# Altium PCB RTTester.PcbDoc (part 2 of 2)
Units mil, origin at the board's own origin, x right, y up, seen from the top; angles counter-clockwise.
Board outline 3930 x 3920 mil, 2 copper layers (Top Layer, Bottom Layer); 146 components, 202 nets, 779 pads, 204 vias.
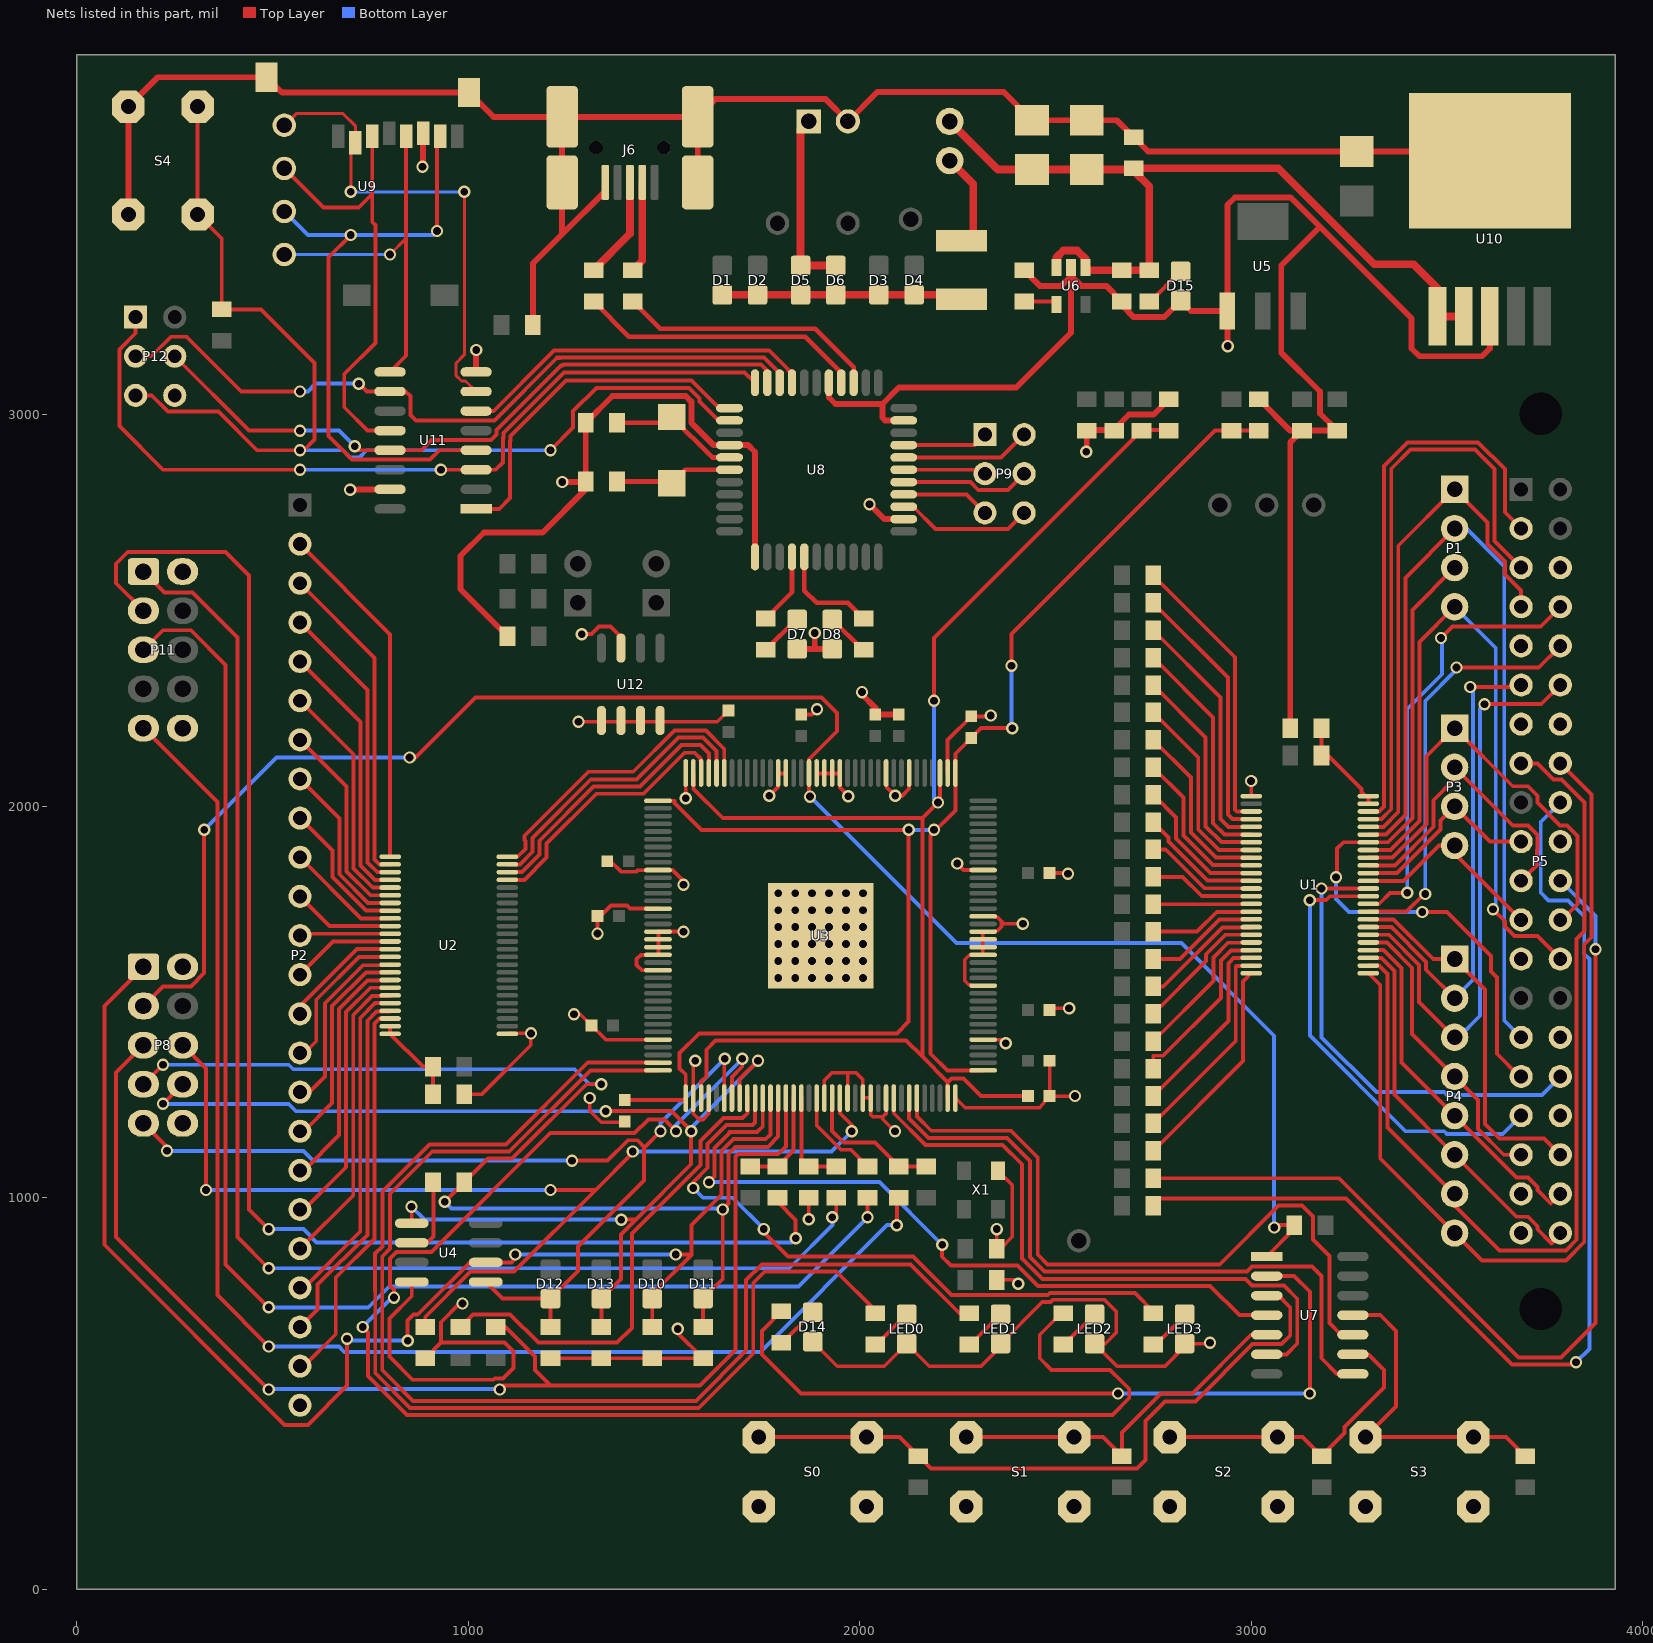
[diagram p2: the nets of this part, all layers, seen from the top]

## Via types
v1: diameter 31.5, hole 19.68, Top Layer to Bottom Layer, tented both sides, 163 vias
v2: diameter 31.5, hole 19.68, Top Layer to Bottom Layer, 36 vias
v3: diameter 39.37, hole 27.56, Top Layer to Bottom Layer, tented both sides, 4 vias
v4: diameter 35.43, hole 27.56, Top Layer to Bottom Layer, tented both sides, 1 vias

## Nets (pads, with @x,y where several pads share a name; then routed paths per layer and width w, separated by ;. In a path a pad name is that pad's centre, name@x,y a point inside that pad or via, vN(x,y) a via of type N, cw(c..) or ccw(c..) an arc to the next point about the centre after c; other vN are vias at no path point) (continued)
FPGAIO_B18: U2.21 U3.106 | length 697.1
  Top Layer w10: U2.21@1099.61,1812.32 1143.21,1812.32 1200,1869.11 1200,1904.7 1327.69,2032.39 1447.7,2032.39 1552.31,2137 1578.4,2137 1593.1,2122.3 1593.1,2118.1 1594.88,2119.88 U3.106@1594.88,2084.37
FPGAIO_B19: U2.22 U3.105 | length 730.5
  Top Layer w10: U2.22@1099.61,1832.01 1137.44,1832.01 1182,1876.57 1182,1912.16 1320.23,2050.39 1438.39,2050.39 1545,2157 1593.09,2157 1614.57,2135.52 U3.105@1614.57,2084.37
FPGAIO_B20: U2.23 U3.104 | length 761.1
  Top Layer w10: U2.23@1099.61,1851.69 1131.67,1851.69 1164,1884.02 1164,1919.62 1312.78,2068.39 1429.39,2068.39 1537,2176 1599.54,2176 1634.25,2141.29 U3.104@1634.25,2084.37
FPGAIO_B21: U2.24 U3.103 | length 792.7
  Top Layer w10: U2.24@1099.61,1871.38 1125.9,1871.38 1146,1891.48 1146,1912.16 1143.93,1914.23 1143.93,1925 1307.39,2088.46 1421.46,2088.46 1527,2194 1607,2194 1653.94,2147.06 U3.103@1653.94,2084.37
GND: C1.2 C2.2 C3.2 C4.2 C5.2 C6.2 C8.2 C10.2 C12.2 C14.2 C17.1 C22.2 C23.2 C24.2 C25.2 C26.2 C27.2 C28.2 C31.2 C33.2 C34.2 C35.2 C42.1 C47.1 C48.2 C49.2 C52.2 C53.2 C54.2 C55.2 C56.1 C57.1 C58.1 C59.2 C60.2 C61.2 C62.2 D7.K D8.K D14.K D15.K J6.5 J6.MH1 J6.MH2 J6.MH3 J6.MH4 LED0.K LED1.K LED2.K LED3.K P2.24 P5.6 P5.9 P5.14 P5.20 P5.25 P5.30 P5.34 P5.39 P6.2 P8.2 P8.10 P11.2 P11.10 P12.6 R34.2 R61.2 S0.1 S1.1 S2.1 S3.1 S4.1 U1.1 U2.1 U3.2 U3.4 U3.19 U3.22 U3.24 U3.25 U3.27 U3.36 U3.41 U3.48 U3.52 U3.53 U3.54 U3.55 U3.57 U3.63 U3.74 U3.79 U3.82 U3.88 U3.89 U3.90 U3.91 U3.95 U3.96 U3.108 U3.118 U3.123 U3.126 U3.127 U3.128 U3.129 U3.131 U3.140 U3.145 U4.4 U5.1 U6.2 U8.5 U8.15 U8.23 U8.35 U8.43 U9.6 U9.GND1 U9.GND3 U10.3 U10.6 U11.8 U11.15 U12.1 U12.2 U12.3 U12.4 U12.7 X1.2 | length 19761.7
  Top Layer w9: C2.2@990,1265 1035,1265 1160,1390 v1(1160,1420) 1100.98,1420 U2.1@1099.61,1418.62 ; v1(1270,1468.61) 1286.39,1468.61 C25.2@1315,1440 1350.75,1404.25 U3.140@1485.63,1404.25 ; v1(1281.51,2216.51) 1342,2216.51 1636.51,2216.51 C22.2@1665,2245 ; v1(1310,1255) 1310,1222.05 1339.3,1192.75 1400,1192.75 C49.2@1400,1195 ; C23.2@1355,1860 1363.74,1860 1390.24,1833.5 1429.76,1833.5 1433.59,1837.32 U3.118@1484.65,1837.32 ; v1(1555.51,2020.51) U3.108@1555.51,2084.37 ; v1(1579.5,1350) 1575.2,1345.69 1575.2,1214.8 1590,1200 1600,1200 1614.57,1214.57 U3.4@1614.57,1255.63 ; v1(1870,945) R34.2@1870,1000 ; D14.K@1880,632.5 1942.5,570 2062.5,570 LED0.K@2120,627.5 2177.5,570 2310,570 2360,620 LED1.K@2360,627.5 2466.25,733.75 2487.49,733.75 2492.74,739 2626.1,739 2655,710.1 2655,655 2627.5,627.5 LED2.K@2600,627.5 2657.5,570 2780,570 2830,620 LED3.K@2830,627.5 2892.5,627.5 v1(2895,630) ; U3.19@1909.84,1255.63 1910,1255.79 1910,1300 1930,1320 1970,1320 ; U3.22@1968.9,1255.63 1968.9,1318.9 1970,1320 ; U3.27@2067.32,1255.63 2067.32,1215.32 2059,1207 ; v1(2090,1170) 2059,1201 2059,1207 ; U3.36@2244.49,1255.63 2270.12,1230 2460,1230 C17.1@2485,1260 ; U3.41@2314.37,1404.25 2363.75,1404.25 v1(2373,1395) ; U3.48@2314.37,1542.05 2284.54,1542.05 2282.26,1544.33 2278.62,1544.33 2268.42,1554.52 2268.42,1608.31 2280.9,1620.79 2314.37,1620.79 2314.37,1679.84 2344.84,1679.84 2347.12,1682.12 2352.09,1682.12 2362.29,1692.32 2362.29,1706.74 ; U3.57@2314.37,1719.21 2344.21,1719.21 2346.49,1716.93 2352.09,1716.93 2362.29,1706.74 ; C3.2@2350,790 2395,790 v1(2405,780) ; v1(2350,920) C4.2@2350,870 2360,870 2390,900 2390,1032.52 X1.2@2353.31,1069.21 ; v1@2410.46,1706.54 v1(2417,1700) 2369.02,1700 2362.29,1706.74 ; C27.2@2485,1350 C17.1@2485,1260 ; C28.2@2485,1480 2489,1484 v1(2535,1484) ; v1(2550,1260) C17.1@2485,1260 ; v1(3000,2065) 3000.39,2064.61 U1.1@3000.39,2026.38 ; 1970,1320 1990,1320 2008.27,1301.73 2008.27,1255.63 2027.95,1255.63 2027.95,1212.05 2033,1207 2059,1207
  Top Layer w10: U4.4@855.51,785 855.51,748.39 798.25,691.13 798.25,594.32 857.57,535 1064.34,535 1068.09,538.75 1088.75,538.75 1115,565 1115,606.97 1091.97,630 930,630 ; R61.2@890,590 930,630 ; v1(985,730) 978.03,730 930,681.97 930,630 ; C54.2@1210,590 C55.2@1340,590 C52.2@1470,590 C53.2@1600,590 1535,655 v1(1535,665) ; v1(1290,2440) 1314.34,2440 1334.34,2460 1363,2460 1393,2430 U12.7@1393,2406.49 ; v1(1330,1675) C24.2@1330,1720 1338.03,1720 1365.03,1747 1404.97,1747 1413.07,1738.9 U3.123@1485.63,1738.9 ; U12.1@1342,2216.51 U12.1@1343,2217.51 ; U3.131@1485.63,1581.42 1443.58,1581.42 1430,1595 1430,1610 1440.79,1620.79 1485.63,1620.79 1485.63,1679.84 1549.84,1679.84 v1(1550,1680) ; 1521.68,1837.32 1550,1809 v1(1550,1800) ; v1(1769,2027) 1791.73,2049.73 1791.73,2084.37 U3.95@1811.42,2084.37 ; C35.2@1850.79,2235 1878,2235 v1(1891,2248) ; U3.91@1890.16,2084.37 1949.21,2084.37 1949.21,2047.79 v1(1971,2026) ; U3.82@2067.32,2084.37 2067.32,2053.68 2069.1,2051.9 2069.1,2048.41 2079.59,2037.92 2083.08,2037.92 v1@2091,2030 ; v1(2091,2027) 2108.38,2027 2126.38,2045 U3.79@2126.38,2084.37 ; U3.74@2224.8,2084.37 2224.8,2169.8 C48.2@2285,2230 2333,2230 v1(2335,2232) ; v1(2249,1854) 2265.68,1837.32 U3.63@2314.37,1837.32 ; C33.2@2485,1830 2530,1830 v1(2532,1828) ; 2540,3355 U6.2@2540,3377.24 ; C59.2@2670,3280 C59.2@2670,3290 ; U10.6@3586.61,3672.99 U10.6@3610,3649.61
  Top Layer w15: S4.1@131.42,3512.21 S4.1@131.42,3787.8 206.62,3863 U9.GND1@484.57,3863 523.57,3824 U9.GND3@1002.28,3824 1064.76,3761.52 J6.MH1@1239.65,3761.52 ; v1(698,2809) 699,2810 U11.15@800,2810 ; v1(883,3634) 884.57,3635.57 U9.6@884.57,3720 ; U11.8@1020,3110 v1(1020,3166) ; C5.2@1100,2435 980,2555 980,2640 1040,2700 1190,2700 1299,2809 C58.1@1299,2829 ; C14.2@1165,3230 1165,3387 1239.65,3461.65 ; v1(1240,2829) C58.1@1299,2829 ; J6.5@1349.89,3594.2 1349.89,3571.89 1239.65,3461.65 ; J6.MH3@1586.11,3594.2 J6.MH4@1586.11,3761.52 ; U8.23@1732.52,2637.56 1732.52,2905.48 1715.01,2922.99 U8.15@1667.56,2922.99 1627.01,2922.99 1569.93,2980.07 1569.93,3034.12 1555.55,3048.5 1368.5,3048.5 C57.1@1300,2980 C58.1@1300,2830 C58.1@1299,2829 ; D7.K@1840,2402.5 1886,2402.5 ; v1(1885,2443) 1885,2403.5 1886,2402.5 ; U8.5@1921.5,3082.44 1921.5,3044.66 1938.16,3028 2058,3028 ; D8.K@1930,2402.5 1886,2402.5 ; v1(2006,2292) 2006,2286 2040,2252 C26.2@2040,2235 C34.2@2100,2235 ; v1(2025,2772) 2062.98,2734.02 U8.35@2112.44,2734.02 ; U8.43@2112.44,2985.98 2065.02,2985.98 2058,2993 2058,3028 ; C60.2@2420,3370 2460,3330 2515,3330 2540,3355 ; C56.1@2570,2962 C61.2@2650,2962 ; v1(2579,2906) 2580,2907 C56.1@2580,2960 ; C61.2@2650,2960 C61.2@2650,2962 ; C59.2@2670,3280 2700,3250 2777.5,3250 D15.K@2820,3292.5 2846.67,3265.83 U5.1@2939.45,3265.83 ; C59.2@2670,3290 2630,3330 2566.2,3330 2540,3356.2 2540,3210 2400,3070 2100,3070 2058,3028 ; C42.1@2790,3040 2751,3001 2688,3001 2650,2963 C61.2@2650,2962 ; v1(2940,3176) 2939.45,3176.55 U5.1@2939.45,3265.83 ; C47.1@3020,3040 3100,2960 C31.2@3130,2960 ; C1.2@3100,2200 3100,2930 C31.2@3130,2960 ; U10.6@3586.61,3672.99 C62.2@3270,3672.99 2737.01,3672.99 C10.2@2700,3710 2657.01,3752.99 C8.2@2580,3752.99 C6.2@2440,3752.99 2367.99,3825 2045,3825 P6.2@1970,3750 1913,3807 1631.59,3807 J6.MH4@1586.11,3761.52 ; U10.3@3610,3251.97 3610,3170 3590,3150 3430,3150 3410,3170 3410,3246.88 3175.94,3480.94 ; 1239.65,3461.65 J6.MH2@1239.65,3594.2 J6.MH1@1239.65,3761.52 ; J6.MH1@1239.65,3761.52 J6.MH4@1586.11,3761.52 ; U5.1@2939.45,3265.83 2939.45,3536.33 2959.03,3555.92 3100.97,3555.92 3175.94,3480.94 ; C31.2@3130,2960 C12.2@3220,2960 3176,3004 3176,3060 3077,3159 3077,3382 3175.94,3480.94
  other v2: 1791.73,1561.73 1835.04,1561.73 1878.35,1561.73 1921.65,1561.73 1964.96,1561.73 2008.27,1561.73 1791.73,1605.04 1835.04,1605.04 1878.35,1605.04 1921.65,1605.04 1964.96,1605.04 2008.27,1605.04 1791.73,1648.35 1835.04,1648.35 1878.35,1648.35 1921.65,1648.35 1964.96,1648.35 2008.27,1648.35 1791.73,1691.65 1835.04,1691.65 1878.35,1691.65 1921.65,1691.65 1964.96,1691.65 2008.27,1691.65 1791.73,1734.96 1835.04,1734.96 1878.35,1734.96 1921.65,1734.96 1964.96,1734.96 2008.27,1734.96 1791.73,1778.27 1835.04,1778.27 1878.35,1778.27 1921.65,1778.27 1964.96,1778.27 2008.27,1778.27
GPIO_A2: P5.3 U1.46 | length 1446.1
  Top Layer w10: U1.46@3299.61,1987.01 3326.9,1987.01 3340,2000.11 3340,2870 3400,2930 3580,2930 3648.47,2861.53 3648.47,2751.53 P5.3@3690,2710
GPIO_A3: P5.5 U1.45 | length 1524.5
  Top Layer w10: U1.45@3299.61,1967.32 3332.67,1967.32 3358,1992.65 3358,2862.54 3407.46,2912 3572.54,2912 3622.27,2862.27 3622.27,2677.73 P5.5@3690,2610
GPIO_A4_INTA: P1.1 P5.7 U1.44 | length 1346.8
  Top Layer w10: U1.44@3299.61,1947.64 3338.44,1947.64 3376,1985.2 3376,2666 P1.1@3520,2810 3604.27,2725.73 3604.27,2670.27 3648.47,2626.07 3648.47,2592.8 3690,2551.27 P5.7@3690,2510
GPIO_A5_INTB: P1.2 P5.29 U1.43 | length 2287.5
  Top Layer w10: U1.43@3299.61,1927.95 3344.21,1927.95 3394,1977.74 3394,2584 P1.2@3520,2710
  Bottom Layer w10: P1.2@3520,2710 3550,2710 3646.75,2613.25 3646.75,1453.25 P5.29@3690,1410
GPIO_A6_INTC: P1.3 P5.31 U1.42 | length 1836.8
  Top Layer w10: v1(3217,1819) 3220,1822 3220,1892 3236.27,1908.27 U1.42@3299.61,1908.27 3349.98,1908.27 3412,1970.29 3412,2502 P1.3@3520,2610 ; v1(3437,1730) 3500,1730 3612.47,1617.53 3612.47,1577.89 3628,1562.36 3628,1368 3686,1310 P5.31@3690,1310
  Bottom Layer w10: v1(3217,1819) 3217,1763 3250,1730 v1(3437,1730)
GPIO_A7_INTD: P1.4 P5.26 U1.41 | length 1797.6
  Top Layer w10: U1.41@3299.61,1888.58 3355.75,1888.58 3430,1962.83 3430,2420 P1.4@3520,2510 ; v1(3618,1737) 3648.47,1706.53 3648.47,1692.8 3672.8,1668.47 3731.53,1668.47 P5.26@3790,1610
  Bottom Layer w10: P1.4@3520,2510 3625,2405 3625,1744 v1(3618,1737)
GPIO_A8_ACKA: P3.1 P5.24 U1.40 | length 1132.2
  Top Layer w10: U1.40@3299.61,1868.9 3361.52,1868.9 3448,1955.38 3448,2128 P3.1@3520,2200 3668.47,2051.53 3707.2,2051.53 3731.53,2027.2 3731.53,2009.74 3789.74,1951.53 3807.2,1951.53 3834,1924.73 3834,1750 3794,1710 P5.24@3790,1710
GPIO_A9_ACKB: P3.2 P5.21 U1.39 | length 799.2
  Top Layer w10: U1.39@3299.61,1849.21 3367.29,1849.21 3466,1947.92 3466,2015.61 3520,2069.61 P3.2@3520,2100 3668.47,1951.53 3707.2,1951.53 3731.53,1927.2 3731.53,1890.64 3730,1889.11 3730,1850 P5.21@3690,1810
GPIO_A10_ACKC: P3.3 P5.19 U1.38 | length 512.1
  Top Layer w10: U1.38@3299.61,1829.53 3373.06,1829.53 3484,1940.46 3484,1964 P3.3@3520,2000 3610,1910 P5.19@3690,1910
GPIO_A11_ACKD: P3.4 P5.23 U1.37 | length 518.2
  Top Layer w10: U1.37@3299.61,1809.84 3389.84,1809.84 3480,1900 P3.4@3520,1900 3520,1880 P5.23@3690,1710
GPIO_A12: P5.32 U1.36 | length 1190
  Top Layer w10: v1(3180,1790) 3299.45,1790 U1.36@3299.61,1790.16
  Bottom Layer w10: v1(3180,1790) 3180,1410 3320,1270 3493.53,1270 3500.53,1263 3743,1263 P5.32@3790,1310
GPIO_A13: P5.33 U1.35 | length 1163.1
  Top Layer w10: v1(3150,1760) 3151.25,1761.25 3191.91,1761.25 3201.13,1770.47 U1.35@3299.61,1770.47
  Bottom Layer w10: v1(3150,1760) 3150,1414.54 3394.54,1170 3493.53,1170 3500.53,1163 3643,1163 P5.33@3690,1210
GPIO_A14: P5.8 U1.34 | length 1138.6
  Top Layer w10: U1.34@3299.61,1750.79 3300.39,1750 3326.11,1750 3355.11,1779 v1(3399,1779) ; v1(3485,2430) 3515,2460 3740,2460 P5.8@3790,2510
  Bottom Layer w10: v1(3399,1779) 3399,2249 3487.5,2337.5 3487.5,2427.5 v1(3485,2430)
GPIO_A15: P5.10 U1.33 | length 1063.9
  Top Layer w10: U1.33@3299.61,1731.1 3397.45,1731.1 3442.34,1776 v1(3445,1776) ; v1(3525,2355) 3735,2355 P5.10@3790,2410
  Bottom Layer w10: v1(3445,1776) 3445,2269.54 3525,2349.54 v1(3525,2355)
GPIO_A16_DATA0: P4.1 P5.36 U1.32 | length 941
  Top Layer w10: U1.32@3299.61,1711.42 3364.04,1711.42 3465.46,1610 P4.1@3520,1610 3598,1532 3598,1188 3634.47,1151.53 3748.47,1151.53 P5.36@3790,1110
GPIO_A17_DATA1: P4.2 P5.11 U1.31 | length 1256.8
  Top Layer w10: U1.31@3299.61,1691.73 3358.27,1691.73 3447.27,1602.73 3447.27,1582.73 P4.2@3520,1510 ; v1(3560,2305) 3685,2305 P5.11@3690,2310
  Bottom Layer w10: P4.2@3520,1510 3567,1557 3567,2298 v1(3560,2305)
GPIO_A18_DATA2: P4.3 P5.12 U1.30 | length 1487
  Top Layer w10: U1.30@3299.61,1672.05 3352.5,1672.05 3429.27,1595.27 3429.27,1500.73 P4.3@3520,1410 ; v1(3596.25,2261.25) 3741.25,2261.25 P5.12@3790,2310
  Bottom Layer w10: P4.3@3520,1410 3530,1410 3585,1465 3585,2250 v1(3596.25,2261.25)
GPIO_A19_DATA3: P4.4 P5.35 U1.29 | length 757.8
  Top Layer w10: U1.29@3299.61,1652.36 3346.73,1652.36 3411.27,1587.82 3411.27,1418.73 P4.4@3520,1310 3580,1250 3580,1175.46 3645.45,1110 P5.35@3690,1110
GPIO_A20_DATA4: P4.5 P5.38 U1.28 | length 914.2
  Top Layer w10: U1.28@3299.61,1632.68 3338.44,1632.68 3384,1587.12 3384,1346 P4.5@3520,1210 3678.47,1051.53 3707.2,1051.53 3731.53,1027.2 3731.53,1019.64 3765.59,985.59 P5.38@3790,1010
GPIO_A21_DATA5: P4.6 P5.40 U1.27 | length 995.1
  Top Layer w10: U1.27@3299.61,1612.99 3332.67,1612.99 3366,1579.66 3366,1264 P4.6@3520,1110 3678.47,951.53 3707.2,951.53 3731.53,927.2 3731.53,919.64 3767.59,883.59 3790,906 P5.40@3790,910
GPIO_A22_DATA6: P4.7 P5.15 U1.26 | length 2421
  Top Layer w10: U1.26@3299.61,1593.31 3326.9,1593.31 3348,1572.2 3348,1180 3518,1010 P4.7@3520,1010 3520,980 3634.41,865.59 3804.31,865.59 3831.53,892.8 3831.53,1661.28 3852,1681.75 3852,2010 3793.53,2068.47 3772.8,2068.47 3731.27,2110 P5.15@3690,2110
GPIO_A23_R/!W: P4.8 P5.16 U1.25 | length 2398.4
  Top Layer w10: U1.25@3299.61,1573.62 3330,1543.23 3330,1100 P4.8@3520,910 3589.88,840.12 3804.3,840.12 3851.25,887.07 3851.25,1646.91 3870,1665.66 3870,2030 P5.16@3790,2110
GPIO_A24: P5.18 R35.2 | length 2811.2
  Top Layer w10: R35.2@2750,980 2768,998 3242,998 3666.12,573.88 3823.88,573.88 v1(3830,580)
  Bottom Layer w10: P5.18@3790,2010 3740,1960 3740,1780 3760,1760 3810,1760 3851.25,1718.75 3851.25,1623.09 3864.12,1610.23 3864.12,614.12 v1(3830,580)
GPIO_A25: P5.22 R36.2 | length 2523.3
  Top Layer w10: R36.2@2750,1050 3225,1050 3683.12,591.88 3791.41,591.88 3880,680.47 v1(3880,1635)
  Bottom Layer w10: P5.22@3790,1810 3880,1720 v1(3880,1635)
GPIO_A26: P5.37
GPIO_A27: P5.13
GPIO_B0: P2.2 U2.25 | length 894.1
  Top Layer w10: P2.2@570,2670 800.39,2439.61 U2.25@800.39,1871.38
GPIO_B1: P2.3 U2.26 | length 829.7
  Top Layer w10: P2.3@570,2570 760.83,2379.17 760.83,1863.96 773.1,1851.69 U2.26@800.39,1851.69
GPIO_B2: P2.4 U2.27 | length 752.8
  Top Layer w10: P2.4@570,2470 742.83,2297.17 742.83,1856.51 767.33,1832.01 U2.27@800.39,1832.01
GPIO_B3: P2.5 U2.28 | length 675.9
  Top Layer w10: P2.5@570,2370 724.83,2215.17 724.83,1849.05 761.56,1812.32 U2.28@800.39,1812.32
GPIO_B4: P2.6 U2.29 | length 598.9
  Top Layer w10: P2.6@570,2270 706.83,2133.17 706.83,1841.59 755.79,1792.64 U2.29@800.39,1792.64
GPIO_B5: P2.7 U2.30 | length 522
  Top Layer w10: P2.7@570,2170 688.83,2051.17 688.83,1834.14 750.02,1772.95 U2.30@800.39,1772.95
GPIO_B6: P2.8 U2.31 | length 445.1
  Top Layer w10: P2.8@570,2070 670.83,1969.17 670.83,1826.68 744.25,1753.27 U2.31@800.39,1753.27
GPIO_B7: P2.9 U2.32 | length 368.1
  Top Layer w10: P2.9@570,1970 652.83,1887.17 652.83,1819.23 738.48,1733.58 U2.32@800.39,1733.58
GPIO_B8: P2.10 U2.33 | length 295.1
  Top Layer w10: P2.10@570,1870 726.1,1713.9 U2.33@800.39,1713.9
GPIO_B9: P2.11 U2.34 | length 261.8
  Top Layer w10: P2.11@570,1770 645.79,1694.21 U2.34@800.39,1694.21
GPIO_B10: P2.12 U2.35 | length 232.3
  Top Layer w10: P2.12@570,1670 574.53,1674.53 U2.35@800.39,1674.53
GPIO_B11: P2.13 U2.36 | length 265.5
  Top Layer w10: P2.13@570,1570 654.84,1654.84 U2.36@800.39,1654.84
GPIO_B12: P2.14 U2.37 | length 310.5
  Top Layer w10: P2.14@570,1470 570,1490 715.16,1635.16 U2.37@800.39,1635.16
GPIO_B13: P2.15 U2.38 | length 394.2
  Top Layer w10: P2.15@570,1370 581.53,1370 611.53,1400 611.53,1506.07 720.93,1615.47 U2.38@800.39,1615.47
GPIO_B14: P2.16 U2.39 | length 474.9
  Top Layer w10: P2.16@570,1270 594,1270 634,1310 634,1497.08 731.02,1594.1 798.71,1594.1 U2.39@800.39,1595.79
GPIO_B15: P2.17 U2.40 | length 543.7
  Top Layer w10: P2.17@570,1170 580,1170 652,1242 652,1489.62 738.48,1576.1 U2.40@800.39,1576.1
GPIO_B16: P2.18 U2.41 | length 620.6
  Top Layer w10: P2.18@570,1070 580,1070 670,1160 670,1482.17 742.57,1554.73 798.71,1554.73 U2.41@800.39,1556.42
GPIO_B17: P2.19 U2.42 | length 697.5
  Top Layer w10: P2.19@570,970 580,970 688,1078 688,1474.71 750.02,1536.73 U2.42@800.39,1536.73
GPIO_B18: P2.20 U2.43 | length 769.6
  Top Layer w10: P2.20@570,870 706,1006 706,1467.25 754.11,1515.36 800.39,1515.36 U2.43@800.39,1517.05
GPIO_B19: P2.21 U2.44 | length 851.4
  Top Layer w10: P2.21@570,770 580,770 724,914 724,1459.8 761.56,1497.36 U2.44@800.39,1497.36
GPIO_B20: P2.22 U2.45 | length 923.5
  Top Layer w10: P2.22@570,670 615,715 615,778 742,905 742,1452.34 765.65,1475.99 800.39,1475.99 U2.45@800.39,1477.68
GPIO_B21: P2.23 U2.46 | length 1005.3
  Top Layer w10: P2.23@570,570 580,570 661.25,651.25 661.25,796.25 760,895 760,1444.89 773.1,1457.99 U2.46@800.39,1457.99
LED0: R3.2 U3.143 | length 2926
  Top Layer w10: U3.143@1485.63,1345.2 1305.2,1345.2 1096.25,1136.25 900.48,1136.25 780.32,1016.09 780.32,875.89 762.13,857.7 762.13,762.3 762.25,762.18 762.25,552.29 851.29,463.25 1588.71,463.25 1728,602.54 1728,782.54 1757.46,812 1940,812 2040,712 R3.2@2040,705
LED1: R4.2 U3.144 | length 3109
  Top Layer w10: U3.144@1485.63,1325.51 1311.78,1325.51 1104.52,1118.25 907.94,1118.25 800,1010.32 800,870.11 780.13,850.25 780.13,769.75 780.25,769.64 780.25,559.75 858.75,481.25 1581.25,481.25 1710,610 1710,790 1750,830 2130,830 2255,705 R4.2@2280,705
LED2: R6.2 U3.7 | length 4033.9
  Top Layer w10: v1(730,670) 744.25,655.75 744.25,544.84 843.84,445.25 2645.91,445.25 2688.75,488.09 2688.75,511.91 2671.91,528.75 2671.25,528.75 2640,560 2490,560 2460,590 2460,650 2515,705 R6.2@2520,705 ; v1(810,745) 810,765.34 800.21,775.14 800.21,844.86 816.53,861.19 905.51,861.19 1209.32,1165.01 1425.01,1165.01 1460,1200 1501.66,1200 1530.5,1171.16 v1(1530.5,1170) ; U3.7@1673.62,1255.63 1673.62,1309.08 1700,1335.46 v1(1700,1355)
  Bottom Layer w10: v1(730,670) 805,745 v1(810,745) ; v1(1530.5,1170) 1529.69,1170.82 1529.69,1184.69 v1(1700,1355)
LED3: R7.2 U3.10 | length 1654.7
  Top Layer w10: v1(1575,1025) 1575,1040.66 1611,1076.66 1611,1137.37 1659.63,1186 1726,1186 1732.68,1192.68 U3.10@1732.68,1255.63 ; v1(1755,920) 1755,911.39 1816.89,849.5 2135.95,849.5 2234.2,751.25 2480.24,751.25 2485.49,756.5 2703.5,756.5 2750,710 R7.2@2750,705
  Bottom Layer w10: v1(1575,1025) 1600,1000 1675,1000 v1(1755,920)
MISO: P12.1 U8.11 U11.3 | length 2123.4
  Top Layer w10: P12.1@150,3250 150,3208.73 108.47,3167.2 108.47,2971.53 220,2860 v1(570,2860) ; v1(930,2860) U11.3@1020,2860 1070,2860 1089,2879 1089,2941.6 1090,2942.6 1090,2954.2 1244.69,3108.89 1706.07,3108.89 U8.11@1732.52,3082.44
  Bottom Layer w10: v1(570,2860) v1(930,2860)
MOSI: P12.4 U8.10 U11.13 | length 1748
  Top Layer w10: P12.4@250,3150 440,2960 v1(570,2960) ; v1(710,2920) 720,2910 U11.13@800,2910 880,2910 906,2936 1057.94,2936 1072,2950.06 1072,2961.65 1237.24,3126.89 1241.34,3126.89 1243.34,3128.89 1748.02,3128.89 1764.02,3112.89 U8.10@1764.02,3082.44
  Bottom Layer w10: v1(570,2960) 670,2960 v1(710,2920)
NetC1_1: C1.1 R1.1 U1.47 U1.48 | length 256.6
  Top Layer w10: C1.1@3180,2200 R1.1@3180,2130 3195.98,2130 3281.61,2044.38 3281.61,2036.92 3292.15,2026.38 U1.48@3299.61,2026.38 U1.47@3299.61,2006.69
NetC2_1: C2.1 R31.1 U2.47 U2.48 | length 233.9
  Top Layer w10: U2.47@800.39,1438.31 U2.48@800.39,1418.62 884.02,1335 R31.1@910,1335 C2.1@910,1265
NetC52_1: C52.1 D10.A P8.1 U3.12 U4.6 | length 3493.2
  Top Layer w10: P8.1@170,1590 70,1490 70,880 530,420 590,420 690,520 v1(690,640) ; v1(845,635) 845,686.97 860.03,702 870.86,702 1003.86,835 U4.6@1044.49,835 1110,835 1120,845 v1(1120,855) ; C52.1@1470,670 D10.A@1470,742.5 1470,754.19 1570,854.19 ; v1@1530.5,854.5 v1(1530,855) 1569.19,855 1570,854.19 ; U3.12@1772.05,1255.63 1772.05,1162.05 1760,1150 1677.12,1150 1647,1119.88 1647,1007.66 1570,930.66 1570,854.19
  Bottom Layer w10: v1(690,640) 695,635 v1(845,635) ; v1(1120,855) v1(1530,855)
NetC53_1: C53.1 D11.A P8.7 R62.2 U3.13 | length 3167.6
  Top Layer w10: P8.7@170,1290 v1(220,1340) ; v1(940,990) R62.2@990,1040 1050.25,1100.25 1111.98,1100.25 1124.59,1112.86 1301.73,1290 v1(1340,1290) ; C53.1@1600,670 D11.A@1600,742.5 1650,792.5 v1(1650,970) 1665,985 1665,1112.43 1682.57,1130 1765.46,1130 1791.73,1156.28 U3.13@1791.73,1255.63
  Bottom Layer w10: v1(220,1340) 541.27,1340 552.8,1328.47 1271.53,1328.47 1310,1290 v1(1340,1290) ; v1(940,990) 957.25,972.75 1647.25,972.75 v1(1650,970)
NetC54_1: C54.1 D12.A P8.9 U3.6 U4.5 | length 2506.1
  Top Layer w10: P8.9@170,1190 230,1130 v1(230,1120) ; U4.5@1044.49,785 1086.99,742.5 D12.A@1210,742.5 ; C54.1@1210,670 D12.A@1210,742.5 ; v1(1265,1095) 1356.09,1095 1408.09,1147.01 1431.91,1147.01 1448.75,1130.17 ; v1(1491.01,1170) 1451.17,1130.17 1448.75,1130.17 ; U3.6@1653.94,1255.63 1653.94,1353.94 v1(1655,1355) ; D12.A@1210,742.5 1280,812.5 1280,875.66 1448.75,1044.4 1448.75,1130.17
  Bottom Layer w10: v1(230,1120) 578.73,1120 603.73,1095 v1(1265,1095) ; v1(1491.01,1170) 1491.01,1191.01 v1(1655,1355)
NetC55_1: C55.1 D13.A P8.8 U3.8 U4.1 | length 3037.8
  Top Layer w10: v1(220,1240) P8.8@270,1290 ; v1(855,977) 855.51,976.49 U4.1@855.51,935 ; C55.1@1340,670 D13.A@1340,742.5 1390,792.5 1390,906.57 1425.43,942 ; v1(1351,1221) 1352,1222 1519.16,1222 1570,1171.16 v1(1570,1170) 1569.18,1169.18 1569.18,1085.75 1425.43,942 ; v1(1391,944) 1423.43,944 1425.43,942 ; U3.8@1693.31,1255.63 1693.31,1303.31 v1(1740,1350)
  Bottom Layer w10: v1(220,1240) 541.27,1240 560.27,1221 v1(1351,1221) ; v1(855,977) 888,944 v1(1391,944) ; v1(1570,1170) 1570,1180 v1(1740,1350)
NetC57_2: C57.2 U8.16 X2.1 | length 336.4
  Top Layer w12: C57.2@1380,2980 1505.35,2980 X2.1@1520,2994.65 1623.15,2891.5 U8.16@1667.56,2891.5
NetC58_2: C58.2 U8.17 X2.2 | length 303.8
  Top Layer w12: C58.2@1380,2830 1515.35,2830 X2.2@1520,2825.35 1554.65,2860 U8.17@1667.56,2860
NetC60_1: C60.1 U6.4 | length 85.6
  Top Layer w10: C60.1@2420,3290 2495.35,3290 U6.4@2502.6,3282.76
NetD1_K: D1.K D2.K D3.K D4.K D5.K D6.K F1.1 | length 650
  Top Layer w20: D1.K@1649,3307 D2.K@1739,3307 D5.K@1849,3307 D6.K@1939,3307 D3.K@2049,3307 D4.K@2139,3307 2268.2,3307 F1.1@2290,3285.2
NetD7_A: D7.A R12.1 | length 112.1
  Top Layer w12: R12.1@1760,2400 1837.5,2477.5 D7.A@1840,2477.5
NetD8_A: D8.A R13.1 | length 112.1
  Top Layer w12: D8.A@1930,2477.5 2007.5,2400 R13.1@2010,2400
NetD14_A: D14.A R55.1 | length 112.1
  Top Layer w10: R55.1@1800,630 1802.5,630 D14.A@1880,707.5
NetD15_A: D15.A R56.1 | length 112.1
  Top Layer w10: R56.1@2740,3290 2742.5,3290 D15.A@2820,3367.5
NetF1_2: F1.2 J5.1 | length 240.1
  Top Layer w20: J5.1@2230,3650 2290,3590 F1.2@2290,3434.8
NetJ6_2: J6.2 R49.1 | length 234.3
  Top Layer w20: R49.1@1420,3370 1444.38,3394.38 J6.2@1444.38,3594.2
NetJ6_3: J6.3 R50.1 | length 262.7
  Top Layer w20: R50.1@1320,3370 1412.88,3462.88 J6.3@1412.88,3594.2
NetLED0_A: LED0.A R3.1 | length 112.1
  Top Layer w10: R3.1@2040,625 2042.5,625 LED0.A@2120,702.5
NetLED1_A: LED1.A R4.1 | length 112.1
  Top Layer w10: R4.1@2280,625 2282.5,625 LED1.A@2360,702.5
NetLED2_A: LED2.A R6.1 | length 112.1
  Top Layer w10: R6.1@2520,625 2522.5,625 LED2.A@2600,702.5
NetLED3_A: LED3.A R7.1 | length 115
  Top Layer w10: R7.1@2750,625 2757.43,625 2830,697.57 LED3.A@2830,702.5
NetP8_3: P8.3 R58.2 U3.92 U7.1 | length 4664.7
  Top Layer w10: P8.3@170,1490 220,1540 291.05,1540 325,1573.95 v1(325,1940) ; v1(850,2125) 865,2125 1018,2278 1902.09,2278 1942,2238.09 1942,2192.05 1870.47,2120.52 1870.47,2027.53 v1(1873,2025) ; U7.1@3040,850 3110,920 R58.2@3110,930 3065,930 v1(3059,924)
  Bottom Layer w10: v1(325,1940) 510,2125 v1(850,2125) ; v1(1873,2025) 2247,1651 2822,1651 3059,1414 v1(3059,924)
NetP8_5: P8.5 R59.2 U3.14 | length 3286.8
  Top Layer w10: P8.5@170,1390 100,1320 100,900 v1(490,510) ; R59.2@1070,670 1095,670 1170,595 1170,560 1210,520 ; v1(1080,510) 1090,520 1210,520 ; U3.14@1811.42,1255.63 1811.42,1131.42 1792,1112 1787.46,1112 1749.97,1112 1690.03,1112 1683,1104.97 1683,611.03 1591.97,520 1210,520
  Bottom Layer w10: v1(490,510) 491.53,511.53 1078.47,511.53 v1(1080,510)
NetP8_6: P8.6 R61.1 U3.21 | length 2803.3
  Top Layer w10: P8.6@270,1390 330,1330 v1(330,1020) ; R61.1@890,670 890,695.68 1005.51,811.19 1116.85,811.19 1325.66,1020 ; v1(1210,1020) 1325.66,1020 ; v1(1420,1118.26) 1420,1114.34 1325.66,1020 ; U3.21@1949.21,1255.63 1949.21,1216.01 1980,1185.22 v1(1980,1170)
  Bottom Layer w10: v1(330,1020) v1(1210,1020) ; v1(1420,1118.26) 1928.26,1118.26 v1(1980,1170)
NetP11_1: P11.1 R44.2 | length 3513.9
  Top Layer w10: P11.1@170,2600 224,2546 295.05,2546 410,2431.05 410,900 v1(490,820) ; v1(1930,950) 1940,960 R44.2@1940,1000
  Bottom Layer w10: v1(490,820) 1820,820 1930,930 v1(1930,950)
NetP11_3: P11.3 R45.2 | length 3704.3
  Top Layer w10: P11.3@170,2500 100,2570 100,2620 130,2650 380,2650 440,2590 440,970 v1(490,920) ; R45.2@1790,1000 1790,990 1836.25,943.75 v1(1836.25,896.25)
  Bottom Layer w10: v1(490,920) 578.73,920 612.48,886.25 1826.25,886.25 v1(1836.25,896.25)
NetP11_5: P11.5 R46.2 | length 3629.4
  Top Layer w10: P11.5@170,2400 220,2450 291.05,2450 380,2361.05 380,830 v1(490,720) ; v1(2020,950) R46.2@2020,1000
  Bottom Layer w10: v1(490,720) 744.34,720 798.09,773.75 1843.75,773.75 v1(2020,950)
NetP11_9: P11.9 R47.2 | length 3529.4
  Top Layer w10: P11.9@170,2200 358.75,2011.25 358.75,751.25 v1(490,620) ; v1(2095,930) 2095,995 R47.2@2100,1000
  Bottom Layer w10: v1(490,620) 669.34,620 683.09,606.25 1746.25,606.25 2070,930 v1(2095,930)
NetR2_2: R2.2 U1.3 | length 728.4
  Top Layer w10: R2.2@2750,2590 2959,2381 2959,1991.33 2963.32,1987.01 U1.3@3000.39,1987.01
NetR5_2: R5.2 U1.4 | length 684.3
  Top Layer w10: R5.2@2750,2520 2941,2329 2941,1979 2952.68,1967.32 U1.4@3000.39,1967.32
NetR8_1: R8.1 S0.2 U7.3 | length 1735
  Top Layer w10: S0.2@1742.2,388.58 S0.2@2017.79,388.58 2101.42,388.58 R8.1@2150,340 2182,308 2708,308 2730,330 2730,430 2780,480 2858.06,480 3004.06,626 3077.94,626 3100,648.06 3100,720 3070,750 U7.3@3040,750
NetR9_1: R9.1 S1.2 U7.5 | length 951.5
  Top Layer w10: S1.2@2272.2,388.58 S1.2@2547.79,388.58 2621.42,388.58 R9.1@2670,340 2670,400 2770,500 2850,500 3000,650 U7.5@3040,650
NetR10_1: R10.1 S2.2 U7.9 | length 790.8
  Top Layer w10: S2.2@2792.2,388.58 S2.2@3067.79,388.58 3131.42,388.58 R10.1@3180,340 3238.87,398.87 3238.87,414.22 3340,515.36 3340,560 3300,600 U7.9@3260,600
NetR11_1: R11.1 S3.2 U7.11 | length 858.1
  Top Layer w10: U7.11@3260,700 3330,700 3370,660 3370,466.38 S3.2@3292.2,388.58 S3.2@3567.79,388.58 3651.42,388.58 R11.1@3700,340
NetR12_2: R12.2 U8.26 | length 185.3
  Top Layer w12: R12.2@1760,2480 1827.01,2547.01 U8.26@1827.01,2637.56
NetR13_2: R13.2 U8.27 | length 267.2
  Top Layer w12: U8.27@1858.5,2637.56 1858.5,2551.5 1890,2520 1970,2520 R13.2@2010,2480
NetR14_2: R14.2 U1.8 | length 503.6
  Top Layer w10: R14.2@2750,2240 2865,2125 2865,1941.26 2917.68,1888.58 U1.8@3000.39,1888.58
NetR15_2: R15.2 U1.9 | length 457.5
  Top Layer w10: R15.2@2750,2170 2846,2074 2846,1933.39 2910.49,1868.9 U1.9@3000.39,1868.9
NetR16_2: R16.2 U1.10 | length 411.4
  Top Layer w10: R16.2@2750,2100 2750,2099.61 2827,2022.61 2827,1925.52 2902.62,1849.9 2999.71,1849.9 U1.10@3000.39,1849.21
NetR17_2: R17.2 U1.11 | length 365.3
  Top Layer w10: R17.2@2750,2030 2808,1972 2808,1917.65 2896.12,1829.53 U1.11@3000.39,1829.53
NetR18_2: R18.2 U1.12 | length 319.2
  Top Layer w10: R18.2@2750,1960 2789,1921 2789,1909.78 2888.25,1810.53 2999.71,1810.53 U1.12@3000.39,1809.84
NetR19_2: R19.2 U1.13 | length 291.7
  Top Layer w10: R19.2@2750,1890 2781.91,1890 2881.07,1790.84 2999.71,1790.84 U1.13@3000.39,1790.16
NetR20_2: R20.2 U1.14 | length 270.9
  Top Layer w10: R20.2@2750,1820 2825.04,1820 2873.88,1771.16 2999.71,1771.16 U1.14@3000.39,1770.47
NetR21_2: R21.2 U1.15 | length 250.7
  Top Layer w10: R21.2@2750,1750 2999.61,1750 U1.15@3000.39,1750.79
NetR22_2: R22.2 U1.16 | length 271.6
  Top Layer w10: R22.2@2750,1680 2861.92,1680 2912.34,1730.42 2999.81,1730.42 U1.16@3000.39,1731.1
NetR23_2: R23.2 U1.17 | length 292.4
  Top Layer w10: R23.2@2750,1610 2818.79,1610 2919.52,1710.73 2999.71,1710.73 U1.17@3000.39,1711.42
NetR24_2: R24.2 U1.18 | length 313.2
  Top Layer w10: R24.2@2750,1540 2775.66,1540 2926.71,1691.05 2999.71,1691.05 U1.18@3000.39,1691.73
NetR25_2: R25.2 U1.19 | length 344.3
  Top Layer w10: R25.2@2750,1470 2884.83,1604.83 2884.83,1622.3 2934.58,1672.05 U1.19@3000.39,1672.05
NetR26_2: R26.2 U1.20 | length 450.1
  Top Layer w10: R26.2@2750,1400 2903.83,1553.83 2903.83,1614.43 2941.08,1651.68 ; U1.20@3000.39,1652.36 U1.20@3000.39,1651.68 ; 2941.08,1651.68 U1.20@3000.39,1651.68 ; 2941.08,1651.68 U1.20@3000.39,1651.68
NetR27_2: R27.2 U1.21 | length 451.2
  Top Layer w10: R27.2@2750,1330 2750,1363 2774.97,1363 2922.83,1510.86 2922.83,1606.56 2948.26,1631.99 2999.71,1631.99 U1.21@3000.39,1632.68
NetR28_2: R28.2 U1.22 | length 528
  Top Layer w10: R28.2@2750,1260 2941.83,1451.83 2941.83,1598.69 2955.45,1612.31 ; U1.22@3000.39,1612.99 U1.22@3000.39,1612.31 ; 2955.45,1612.31 U1.22@3000.39,1612.31 ; 2955.45,1612.31 U1.22@3000.39,1612.31
NetR29_2: R29.2 U1.23 | length 566.9
  Top Layer w10: R29.2@2750,1190 2960.83,1400.83 2960.83,1590.82 2962.63,1592.62 ; U1.23@3000.39,1593.31 U1.23@3000.39,1592.62 ; 2962.63,1592.62 U1.23@3000.39,1592.62 ; 2962.63,1592.62 U1.23@3000.39,1592.62
NetR30_2: R30.2 U1.24 | length 557.3
  Top Layer w10: R30.2@2750,1120 2979,1349 2979,1552.23 U1.24@3000.39,1573.62
NetR32_2: R32.2 R45.1 U3.15 | length 262.7
  Top Layer w10: R32.2@1720,1080 R45.1@1790,1080 1831.1,1121.1 U3.15@1831.1,1255.63
NetR33_2: R33.2 R47.1 U3.20 | length 363.8
  Top Layer w10: U3.20@1930,1255.16 1929.53,1255.63 1929.53,1170.47 1959.25,1140.75 2039.25,1140.75 R47.1@2100,1080 R33.2@2170,1080
NetR34_1: R34.1 R44.1 U3.16 | length 273.6
  Top Layer w10: U3.16@1850.79,1255.63 1850.79,1099.21 R34.1@1870,1080 R44.1@1940,1080 R44.1@1960,1080
NetR37_2: R37.2 U1.5 | length 640.1
  Top Layer w10: R37.2@2750,2450 2922,2278 2922,1968 2942.36,1947.64 U1.5@3000.39,1947.64
NetR38_2: R38.2 U1.6 | length 595.8
  Top Layer w10: R38.2@2750,2380 2903,2227 2903,1957 2932.05,1927.95 U1.6@3000.39,1927.95
NetR39_2: R39.2 U1.7 | length 549.7
  Top Layer w10: R39.2@2750,2310 2884,2176 2884,1949.13 2924.18,1908.95 2999.71,1908.95 U1.7@3000.39,1908.27
NetR46_1: R46.1 U3.18 | length 244.3
  Top Layer w10: U3.18@1890.16,1255.63 1890.16,1184.39 1951.8,1122.75 1977.25,1122.75 R46.1@2020,1080
NetR49_2: R49.2 U8.3 | length 673.8
  Top Layer w12: R49.2@1420,3290 1490,3220 1886.71,3220 1984.49,3122.22 U8.3@1984.49,3082.44
NetR50_2: R50.2 U8.4 | length 734.1
  Top Layer w12: R50.2@1320,3290 1410,3200 1861.25,3200 1952.99,3108.26 U8.4@1952.99,3082.44
NetR55_2: R55.2 U7.2 | length 1958.7
  Top Layer w10: R55.2@1800,710 1750,660 1750,600 1850,500 v1(2660,500) ; U7.2@3040,800 3110,800 3150,760 v1(3150,500)
  Bottom Layer w10: v1(2660,500) v1(3150,500)
NetR60_2: R60.2 U3.9 | length 1235.2
  Top Layer w10: R60.2@980,670 1012,702 1107,702 1179,630 1380,630 1417.73,667.73 1417.73,908.84 1593,1084.11 1593,1144.82 1652.18,1204 1700.98,1204 1712.99,1216.01 U3.9@1712.99,1255.63
NetR62_1: R62.1 U4.2 | length 205.7
  Top Layer w10: U4.2@855.51,885 860.78,890.27 889.73,890.27 895,885 910.82,900.82 910.82,1039.18 R62.1@910,1040
PF0: P9.1 U8.41 | length 218.7
  Top Layer w10: U8.41@2112.44,2922.99 2292.99,2922.99 P9.1@2320,2950
PF1: P9.2 U8.40 | length 331.8
  Top Layer w10: U8.40@2112.47,2891.53 2361.53,2891.53 P9.2@2420,2950
PF4: P9.3 U8.39 | length 211.7
  Top Layer w10: U8.39@2112.44,2860 2310,2860 P9.3@2320,2850
PF5: P9.4 U8.38 | length 333.1
  Top Layer w10: U8.38@2112.44,2828.5 2282.77,2828.5 2302.8,2808.47 2378.47,2808.47 P9.4@2420,2850
PF6: P9.5 U8.37 | length 227
  Top Layer w10: U8.37@2112.44,2797.01 2272.99,2797.01 P9.5@2320,2750
PF7: P9.6 U8.36 | length 348.4
  Top Layer w10: U8.36@2112.44,2765.51 2136.85,2765.51 2193.89,2708.47 2378.47,2708.47 P9.6@2420,2750
RESET: P12.5 R51.1 S4.2 U8.13 | length 2801.8
  Top Layer w10: P12.5@150,3050 191.27,3050 232.8,3008.47 361.53,3008.47 460,2910 v1(570,2910) 580,2910 607,2937 607,3133 470,3270 R51.1@370,3270 370,3450.79 S4.2@308.58,3512.21 S4.2@308.58,3787.8 ; v1(1210,2910) 1268,2968 1268,3009.97 1327.03,3069 1564.04,3069 1590.43,3042.61 1590.43,3034.57 1639.02,2985.98 U8.13@1667.56,2985.98
  Bottom Layer w10: v1(570,2910) 679.34,2910 698.09,2891.25 721.91,2891.25 740.66,2910 v1(1210,2910)
SCK: P12.3 U8.9 U11.10 | length 1922.8
  Top Layer w10: P12.3@150,3150 190,3150 240,3200 280,3200 420,3060 v1(570,3060) ; v1(720,3080) 720.66,3080 740.66,3060 U11.10@800,3060 840,3060 852,3048 852,3000.06 866.06,2986 1066.46,2986 1225.34,3144.89 1233.89,3144.89 1225.89,3145.89 1226.89,3146.89 1755.47,3146.89 1795.51,3106.85 U8.9@1795.51,3082.44
  Bottom Layer w10: v1(570,3060) 590,3060 610,3080 v1(720,3080)
SPI_M/!S: U8.12 U11.1 | length 905.1
  Top Layer w10: U11.1@1020,2760 1079.07,2760 1107,2787.93 1107,2934.15 1108,2935.15 1108,2946.74 1249.26,3088 1570.5,3088 1641.02,3017.48 U8.12@1667.56,3017.48
SS: U8.8 U11.6 | length 933.6
  Top Layer w10: U11.6@1020,3010 1065,3010 1207.89,3152.89 1207.89,3153.34 1219.43,3164.89 1768.97,3164.89 1818.34,3115.52 1818.34,3112.99 ; U8.8@1827.01,3082.44 U8.8@1827.01,3112.99 ; 1818.34,3112.99 U8.8@1827.01,3112.99 ; 1818.34,3112.99 U8.8@1827.01,3112.99
SW0: U3.11 U7.4 | length 1897.9
  Top Layer w10: v1(1615,1040) 1629,1054 1629,1127.34 1667.09,1165.43 1667.09,1168 1738,1168 1752.36,1182.36 U3.11@1752.36,1255.63 ; v1(2210.66,880) 2210.66,849.34 2233,827 2403,827 2455.5,774.5 2895.5,774.5 2970,700 U7.4@3040,700
  Bottom Layer w10: v1(1615,1040) 2050.66,1040 v1(2210.66,880)
SW1: U3.28 U7.6 | length 1611.6
  Top Layer w10: U3.28@2087.01,1255.63 2087.01,1216.08 2167.88,1135.21 2364.79,1135.21 2414.37,1085.63 2414.37,844.72 2466.59,792.5 2985.56,792.5 3002.06,776 3084,776 3118,742 3118,628 3090,600 U7.6@3040,600
SW2: U3.30 U7.8 | length 1733.7
  Top Layer w10: U3.30@2126.38,1255.63 2126.38,1202.17 2175.33,1153.21 2376.41,1153.21 2435.32,1094.31 2435.32,849.23 2472.54,812 2990.06,812 3002.06,824 3156,824 3180,800 3180,590 3220,550 U7.8@3260,550
SW3: U3.31 U7.10 | length 1796.7
  Top Layer w10: U3.31@2146.06,1255.63 2146.06,1207.94 2182.79,1171.21 2386.25,1171.21 2455,1102.46 2455,855 2480,830 2920,830 3070,980 3130,980 3158,952 3158,893 3200,851 3200,680 3230,650 U7.10@3260,650
USD_MISO: pad.0@530,3520 U9.7 U11.4 | length 1613.5
  Top Layer w10: v1(700,3460) 643,3403 643,2946.34 703.34,2886 902,2886 926,2910 U11.4@1020,2910 ; v1(920,3470) 920,3704.13 U9.7@927.87,3712
  Bottom Layer w10: pad.0@530,3520 590,3460 v1(700,3460) 910,3460 v1(920,3470)
USD_MOSI: pad.0@530,3630 U9.3 U11.12 | length 1150.5
  Top Layer w10: pad.0@530,3630 630,3530 720,3530 754.65,3564.65 ; U9.3@754.65,3712 754.65,3564.65 ; U11.12@800,2960 742.67,2960 683,3019.67 683,3105 762.38,3184.38 762.38,3485.4 754.65,3493.13 754.65,3564.65
USD_SCK: pad.0@530,3410 U9.5 U11.9 | length 947.4
  Top Layer w8: v1(800,3410) 841.26,3451.26 841.26,3460
  Top Layer w10: U11.9@800,3110 841.26,3151.26 841.26,3451.26 ; 841.26,3460 U9.5@841.26,3712
  Bottom Layer w8: pad.0@530,3410 v1(800,3410)
USD_SS: pad.0@530,3740 U9.2 U11.7 | length 1216.1
  Top Layer w8: pad.0@530,3740 560,3770 680,3770 711.34,3738.66 U9.2@711.34,3696 700,3684.66 v1(700,3570) ; v1(990,3570) 990,3154 969,3133 969,3100.47 982.47,3087 993,3087 U11.7@1020,3060
  Bottom Layer w8: v1(700,3570) v1(990,3570)
VCC_EXT: C6.1 C8.1 C10.1 C59.1 J5.2 R56.2 U6.1 U6.3 U10.1 U10.2 | length 2572.8
  Top Layer w20: J5.2@2230,3750 2352.99,3627.01 C6.1@2440,3627.01 C8.1@2580,3627.01 C10.1@2697.01,3627.01 ; U6.3@2502.6,3377.24 2502.6,3402.6 2520,3420 2555.74,3420 2577.4,3398.33 U6.1@2577.4,3377.24 2584.65,3370 C59.1@2670,3370 R56.2@2740,3370 2740,3584.02 ; U10.2@3543.07,3251.97 U10.1@3476.14,3251.97 3476.14,3323.86 3415,3385 3315,3385 3069.58,3630.42 ; C10.1@2697.01,3627.01 2740,3584.02 ; C10.1@2697.01,3627.01 2740,3584.02 ; C10.1@2697.01,3627.01 C10.1@2700,3630 C10.1@2700,3630.42 ; C10.1@2700,3630.42 3069.58,3630.42 ; C10.1@2700,3630.42 3069.58,3630.42
VCC_HDR: D5.A D6.A P6.1 | length 466.7
  Top Layer w20: P6.1@1870,3750 1849,3729 D5.A@1849,3382 D6.A@1939,3382
VCCA: C17.2 C42.2 L1.2 U3.3 U3.35 U3.75 U3.107 | length 3712.3
  Top Layer w10: U3.107@1575.2,2084.37 1575.2,2044.8 1650,1970 2160,1970 ; U3.3@1594.88,1255.63 1594.88,1296.63 1608.25,1310 1608.25,1378.25 1632,1402 2118.46,1402 2160,1360.46 ; v1(2190,2270) 2190,2430 L1.2@2720,2960 2720,2962 2790,2962 C42.2@2790,2960 ; U3.75@2205.12,2084.37 2205.12,2015.12 v1(2200,2010) 2160,1970 ; U3.35@2224.8,1255.63 2224.8,1294.8 ; C17.2@2430,1260 2310,1260 2265,1305 2235,1305 2224.8,1294.8 ; 2160,1360.46 2223.12,1297.34 2223.12,1296.49 2224.8,1294.8 ; 2160,1360.46 2160,1970
  Bottom Layer w10: v1(2190,2270) 2190,2020 v1(2200,2010)
VCCD_PLL: C47.2 C48.1 C49.1 L2.2 U3.1 U3.37 U3.73 U3.109 | length 4349.7
  Top Layer w10: C49.1@1400,1250 1549.88,1250 1555.51,1255.63 1555.51,1314.49 1540,1330 1540,1370 1590,1420 2095,1420 2125,1450 v1(2125,1940) 1595.37,1940 1526.76,2008.6 1526.76,2014.49 U3.109@1485.63,2014.49 ; U3.37@2314.37,1325.51 2223.83,1325.51 2181.25,1368.09 2181.25,1926.25 2244.49,1989.49 2244.49,2134.49 C48.1@2285,2175 2310,2200 v1(2390,2200) ; v1(2388,2359) 2388,2440.15 2907.85,2960 L2.2@2950,2960 C47.2@3040,2960
  Bottom Layer w10: v1(2125,1940) v1(2190,1940) ; v1(2388,2359) 2388,2202 v1(2390,2200)
pads on no net: D1.0 D2.0 D3.0 D4.0 D5.0 D6.0 D7.0 D8.0 D10.0 D11.0 D12.0 D13.0 D14.0 D15.0 J6.4 J6.H1 J6.H2 LED0.0 LED1.0 LED2.0 LED3.0 P5.1 P5.17 P8.0 P11.0 P11.6 P11.7 P11.8 S0.0 S1.0 S2.0 S3.0 S4.0 U3.80 U7.7 U7.12 U7.13 U7.14 U8.1 U8.2 U8.22 U8.25 U8.28 U8.29 U8.30 U8.31 U8.32 U8.33 U9.1 U9.8 U9.CD1 U9.CD2 U10.5 X1.1
copper on no net: | length 1068.2
  Top Layer w45: 3825.01,716 ccw(c3740,716) 3825.01,716 ; 3825.01,3003 ccw(c3740,3003) 3825.01,3003

## Polygon pours and split planes (outlines as drawn)
GND on Bottom Layer "Bottom Layer-No Net" (solid, pour order 2): 0,3920 0,0 3930,0 3930,3920

## Keep-outs
Bottom Layer:
  circle w1: c3740,3003 r110.02
  circle w1: c3740,716 r110.02

## Silkscreen, mask and mechanical layers (free items; w line width, h text height)
Top Overlay:
  circle w6: c2560,890 r40.31
  circle w6: c2130,3500 r40.31
  circle w6: c1790,3490 r40.31
  circle w6: c1970,3490 r40.31
  circle w6: c3040,2770 r40.31
  circle w6: c2920,2770 r40.31
  circle w6: c3160,2770 r40.31
  text "5VUSB" at 1730,3440 h32 r90
  text "V-HDR" at 1910,3440 h32 r90
  text "5V_RPi" at 2060,3440 h32 r90
  text "1V2" at 2880,2830 h32
  text "2V5" at 3000,2830 h32
  text "3V3" at 3120,2830 h32
  text "uC-RX" at 1550,2610 h32
  text "SCL" at 1390,2590 h32 r90
  text "uC-TX" at 1550,2510 h32
  text "SDA" at 1390,2480 h32 r90
  text "Com" at 1740,2310 h32
  text "Err/Busy" at 1900,2310 h32
  text "FPGA_CLK" at 2630,870 h32
  text "(Conf)" at 1950,730 h32 r270
Bottom Overlay:
  circle w6: c530,3630 r40.31
  circle w6: c530,3520 r40.31
  circle w6: c530,3740 r40.31
  circle w6: c530,3410 r40.31
  text "SS" at 460,3770 h32 r90
  text "uSD_Testpoints" at 630,3730 h32 r90
  text "MOSI" at 460,3690 h32 r90
  text "MISO" at 460,3560 h32 r90
  text "SCK" at 460,3440 h32 r90
Mechanical 1:
  lines w1: 1810,706 1810,726 ; 1870,696 1810,716 ; 1870,736 1810,716 ; 2499.08,716 1810,716 ; 3050.92,716 3740,716 ; 3680,696 3740,716 ; 3680,736 3740,716 ; 3740,706 3740,726
  text "1930 (mil)" at 2509.08,680.01 h60
Mechanical 13:
  lines w1: 3490,2810 3590,2810 ; 3530,2790 3590,2810 ; 3530,2830 3590,2810 ; 3590,2800 3590,2820 ; 3690,2800 3690,2820 ; 3720,920 3740,860 ; 3720,1800 3740,1860 ; 3730,860 3750,860 ; 3730,1860 3750,1860 ; 3740,1084.08 3740,860 ; 3740,1635.92 3740,1860 ; 3750,2790 3690,2810 ; 3750,2830 3690,2810 ; 3760,920 3740,860 ; 3760,1800 3740,1860 ; 3790,2810 3690,2810 ; 3873.01,775.41 3893.01,715.41 ; 3873.01,2942.41 3893.01,3002.41 ; 3883.01,715.41 3903.01,715.41 ; 3883.01,3002.41 3903.01,3002.41 ; 3893.01,1578 3893.01,715.41 ; 3893.01,2139.83 3893.01,3002.41 ; 3913.01,775.41 3893.01,715.41 ; 3913.01,2942.41 3893.01,3002.41
  text "100.001 (mil)" at 3294.11,2666.04 h60
  text "2287 (mil)" at 3929,1588 h60 r90
  text "1000 (mil)" at 3775.99,1094.08 h60 r90

## Dimensions
3600,716 to 3660,1860 on Mechanical 13

## Text inside footprints (layer, text, board x,y; h text height)
P5: Top Overlay "1" at 3600,2788 h50; Top Overlay "2" at 3859,2793 h50; Top Overlay "40" at 3770,830 h50 r270; Top Overlay "39" at 3670,830 h50 r270
P8: Top Overlay "2" at 380,1580 h30 r90; Top Overlay "1" at 75,1590 h30 r270; Top Overlay "10" at 380,1170 h30 r90; Top Overlay "9" at 75,1210 h30 r270
P9: Top Overlay "1" at 2300,3040 h50 r270; Top Overlay "2" at 2400,3060 h50 r270; Top Overlay "5" at 2300,2680 h50 r270; Top Overlay "6" at 2400,2680 h50 r270
P11: Top Overlay "2" at 380,2590 h30 r90; Top Overlay "1" at 75,2600 h30 r270; Top Overlay "10" at 380,2180 h30 r90; Top Overlay "9" at 75,2220 h30 r270
P12: Top Overlay "1" at 130,3340 h50 r270; Top Overlay "2" at 230,3360 h50 r270; Top Overlay "5" at 130,2980 h50 r270; Top Overlay "6" at 230,2980 h50 r270
U9: Mechanical 2 ">Name" at 670,3540 h49.6; Mechanical 4 ">Value" at 670,3490 h49.6